# EAGLE board rat_clone_v01 (EAGLE 5.10)
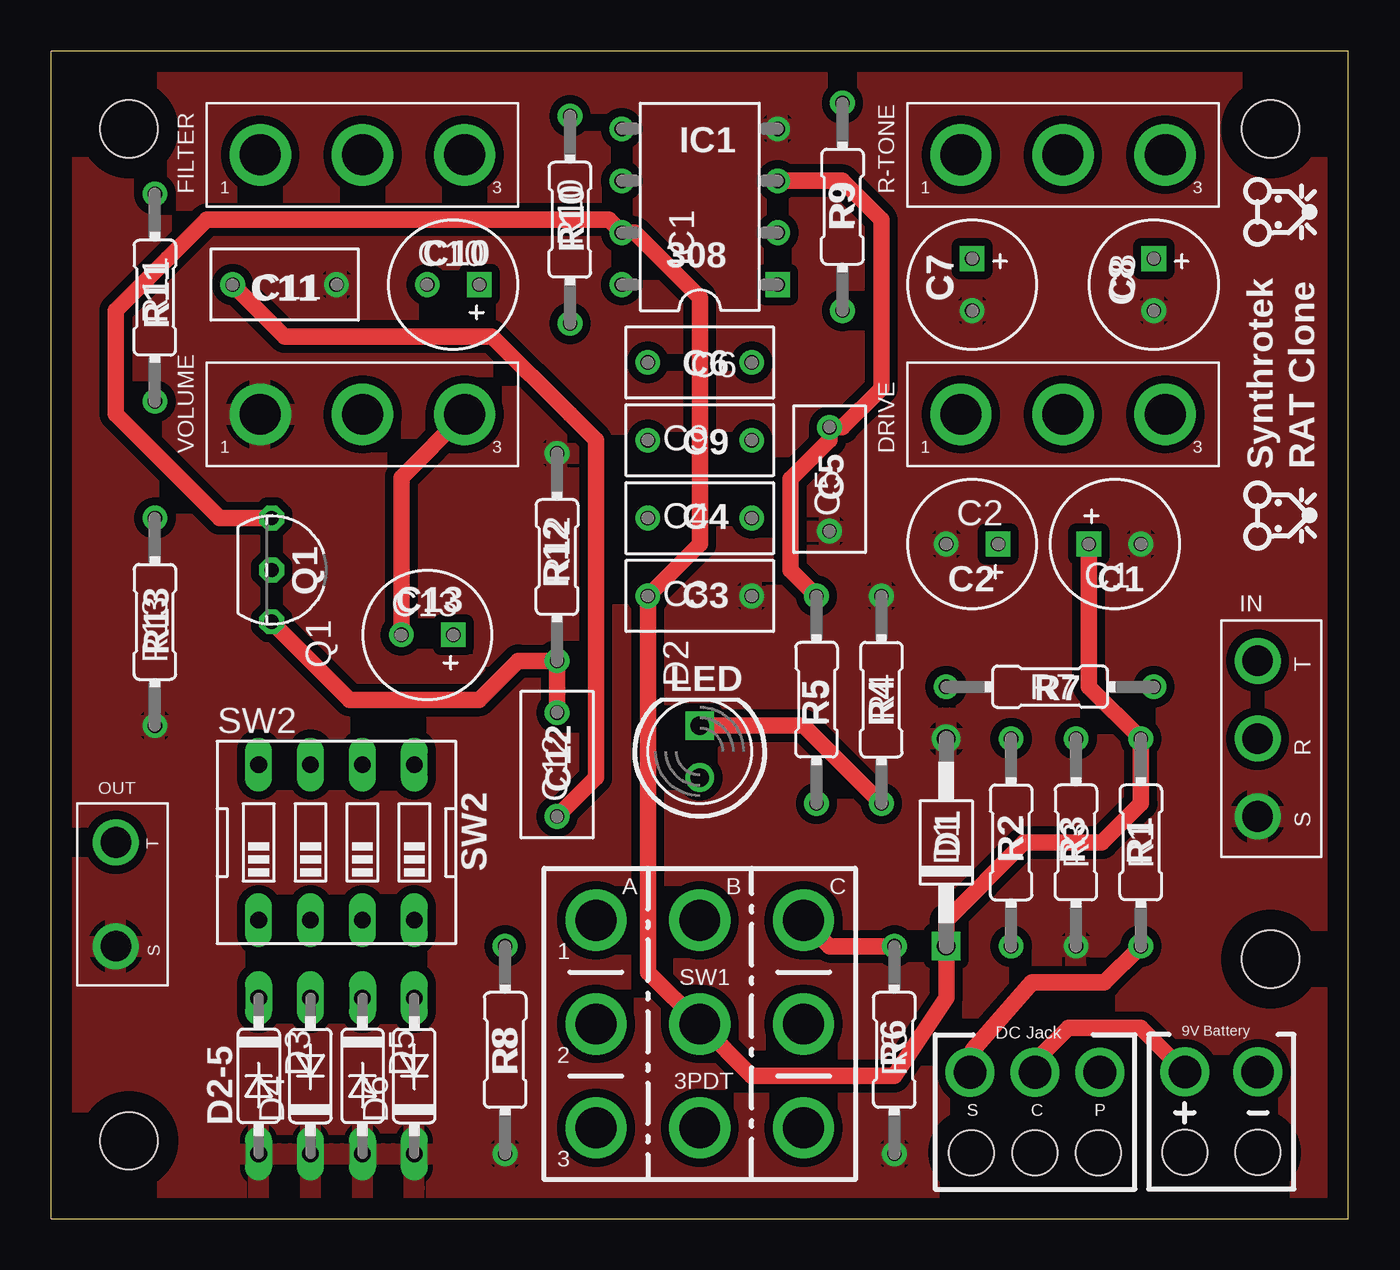
[diagram p0: board, top side]
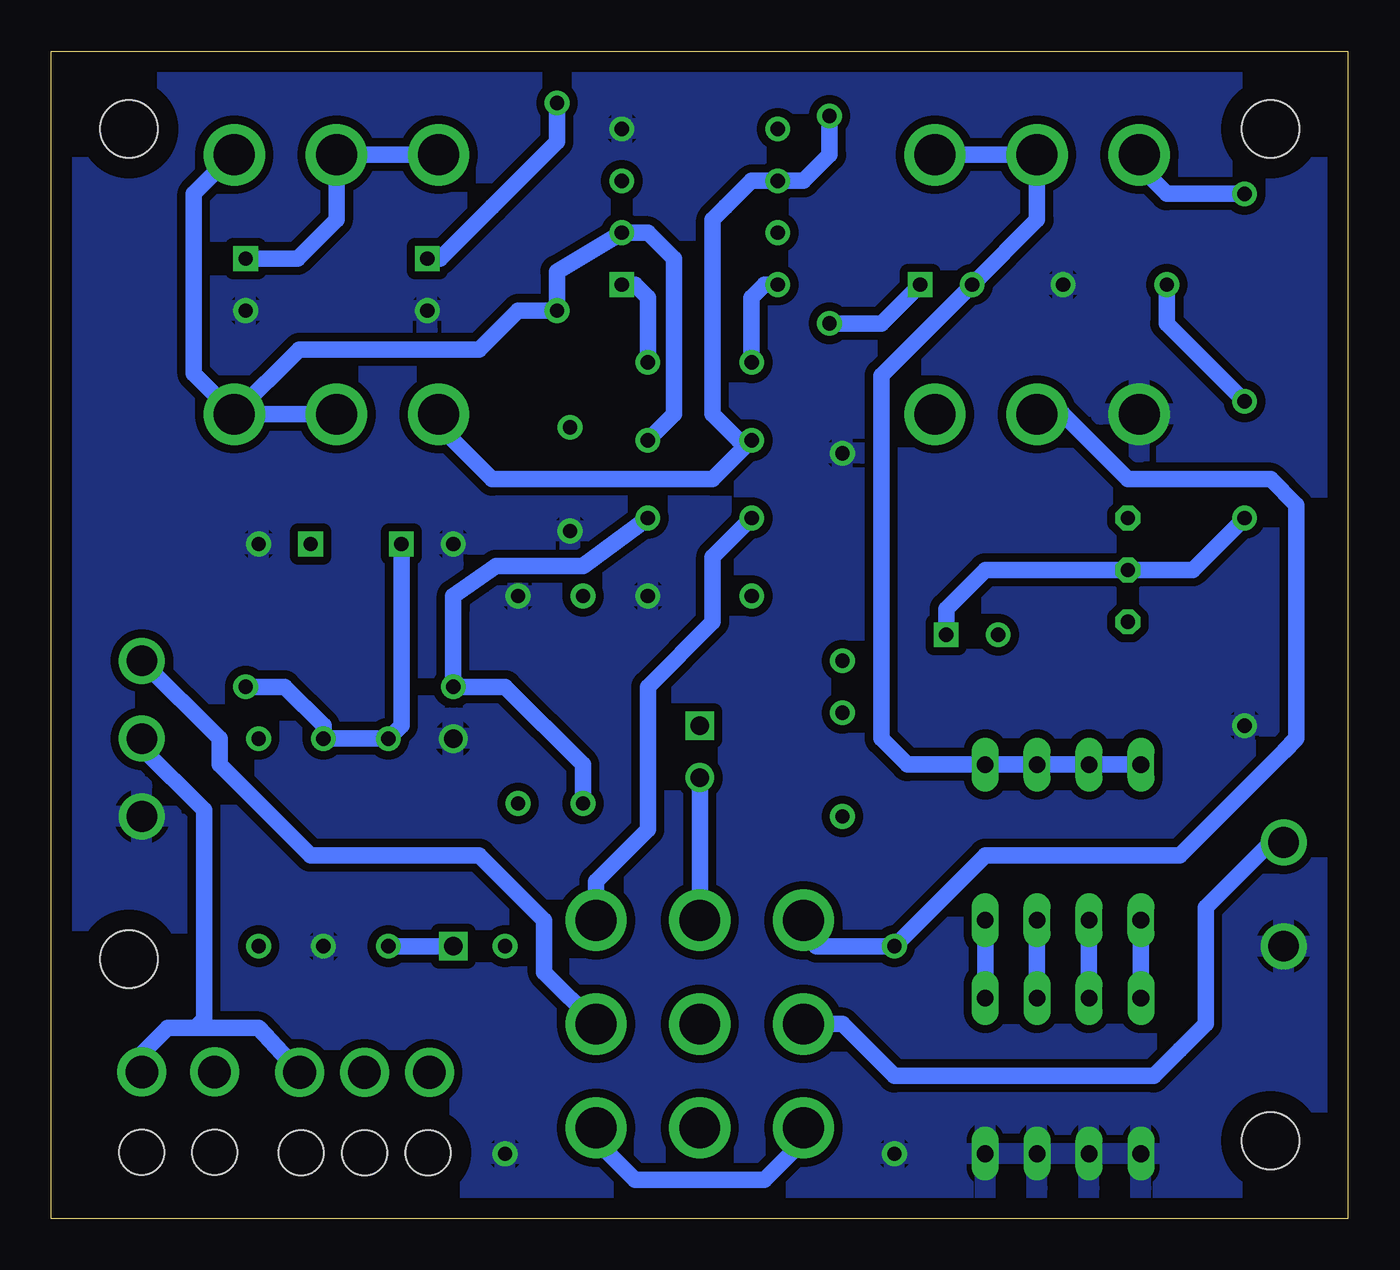
[diagram p1: board, bottom side, seen from below]

Size 63.5 x 57.15 mm. Coordinates in mm from the lower left corner, seen from the top.
Outline: 0,0 63.5,0 63.5,57.15 0,57.15 0,0
Copper layers (1*16): Top 0.035mm / dielectric 1.5mm / Bottom 0.035mm
Design rules "default": minimum track width 10mil, minimum drill 24mil, track to track 8mil, track to pad 8mil, pad to pad 8mil, via to via 8mil, smd to smd 8mil, copper to edge 40mil, drill to drill 8mil, minimum pad ring 10mil, minimum via ring 8mil, stop-mask expansion 4mil, vias tented up to drill 0mil, thermal gap 10mil
Holes 2.8 mm at 3.81,3.81 59.69,12.7 59.69,53.34 3.81,53.34

## Footprints (pad centres in the part's own frame; a part is rotated, then mirrored left to right if it is on the bottom)
063_025 = drill 0.7 square: + -1.27,0 | drill 0.7 round: - 1.27,0
072X035 = drill 0.7 round: 1 -2.54,0; 2 2.54,0
DO41-4 = drill 0.9 round: A 5.08,0 | drill 0.9 square: C -5.08,0
LED5MM = drill 0.9 round: A -1.27,0 | drill 0.9 square: K 1.27,0
DO35-7 = drill 0.813 long: A 3.81,0; C -3.81,0
POT = drill 2 round: 1 -5,0; 2 0,0; 3 5,0
DIL08 = drill 0.7 square: 1 -3.81,-3.81 | drill 0.7 round: 2 -1.27,-3.81; 3 1.27,-3.81; 4 3.81,-3.81; 5 3.81,3.81; 6 1.27,3.81; 7 -1.27,3.81; 8 -3.81,3.81
STEREO_JACK = drill 1.5 round: R 0,0; S 3.81,0; T -3.81,0
MONO_JACK = drill 1.5 round: SLEEVE 2.54,0; TIP -2.54,0
TO-92 = drill 0.7 octagon: 1 -2.54,0; 2 0,0; 3 2.54,0
R0207/4 = drill 0.7 round: 1 -5.08,0; 2 5.08,0
3PDT = drill 2 round: A1 -5.08,5.08; A2 -5.08,0; A3 -5.08,-5.08; B1 0,5.08; B2 0,0; B3 0,-5.08; C1 5.08,5.08; C2 5.08,0; C3 5.08,-5.08
EDG-04 = drill 0.813 long: 1 -3.81,-3.81; 2 -1.27,-3.81; 3 1.27,-3.81; 4 3.81,-3.81; 5 3.81,3.81; 6 1.27,3.81; 7 -1.27,3.81; 8 -3.81,3.81
9V_BATTERY = drill 1.6 round: 9V_BATTERY_+ -1.778,1.27; 9V_BATTERY_- 1.778,1.27 | hole 2.2: -1.778,-2.667; 1.778,-2.667
DC_JACK_OFFBOARD = drill 1.6 round: CONNECT 0,1.27; PIN 3.175,1.27; SLEEVE -3.175,1.27 | hole 2.2: -3.111,-2.667; 0,-2.667; 3.111,-2.667

## Placement (x,y rotation side)
C1  100uF  [063_025]  52.07,33.02 0 top
C2  47uF  [063_025]  45.09,33.02 180 top
C3  47nF  [072X035]  31.75,30.48 0 top
C4  22nF  [072X035]  31.75,34.29 0 top
C5  0.001uF  [072X035]  38.1,36.2 90 top
C6  30pF  [072X035]  31.75,41.91 180 top
C7  4.7uF  [063_025]  45.09,45.72 270 top
C8  2.2uF  [063_025]  53.98,45.72 270 top
C9  100pF  [072X035]  31.75,38.1 0 top
C10  4.7uF  [063_025]  19.68,45.72 180 top
C11  0.0033uF  [072X035]  11.43,45.72 180 top
C12  0.0022uF  [072X035]  24.77,22.23 90 top
C13  1uF  [063_025]  18.41,28.57 180 top
D1  1N4002  [DO41-4]  43.81,18.41 90 top
D2  LED5MM  [LED5MM]  31.75,22.86 90 top
D3  1N914  [DO35-7]  10.16,6.99 270 top
D4  1N914  [DO35-7]  12.7,6.99 90 top
D5  1N34  [DO35-7]  15.24,6.99 270 top
D6  1N34  [DO35-7]  17.78,6.99 90 top
DRIVE  100kA  [POT]  49.53,39.37 0 top
FILTER  100kA  [POT]  15.24,52.07 0 top
IC1  LM308N  [DIL08]  31.75,49.53 90 top
IN  [STEREO_JACK]  59.05,23.5 270 top
OUT  [MONO_JACK]  3.17,15.88 270 top
Q1  2N5458  [TO-92]  10.79,31.75 270 top
R1  47  [R0207/4]  53.34,18.41 90 top
R2  100k  [R0207/4]  46.99,18.41 270 top
R3  100k  [R0207/4]  50.16,18.41 90 top
R4  1k  [R0207/4]  40.64,25.4 270 top
R5  1k  [R0207/4]  37.47,25.4 90 top
R6  1M  [R0207/4]  41.27,8.26 90 top
R7  1M  [R0207/4]  48.9,26.04 180 top
R8  1M  [R0207/4]  22.23,8.26 90 top
R9  560  [R0207/4]  38.73,49.53 270 top
R10  1k  [R0207/4]  25.4,48.9 90 top
R11  1.5K  [R0207/4]  5.08,45.09 90 top
R12  1M  [R0207/4]  24.77,32.38 90 top
R13  10k  [R0207/4]  5.08,29.21 270 top
R-TONE  1k  [POT]  49.53,52.07 0 top
SW1  3PDT  [3PDT]  31.75,9.53 0 top
SW2  [EDG-04]  13.97,18.41 0 top
U$1  9V_BATTERY_CLIP  [9V_BATTERY]  57.28,5.91 0 top
U$2  DC_JACK_OFFBOARD  [DC_JACK_OFFBOARD]  48.16,5.89 0 top
VOLUME  100kA  [POT]  15.24,39.37 0 top

## Library data of the parts
C1 C2 C7 C8 C10 C13 = gm-caps-electro-pol
C3-C6 C9 C11 C12 = gm-caps-film-box
D1 D2 = gm-diodes
D3-D6 = diode
DRIVE FILTER IN OUT Q1 R-TONE SW1 U$1 U$2 VOLUME = 00_steve
IC1 = gm-ics
R1-R13 = gm-resistors
SW2 = special

## Nets
4.5V: C2.+ R2.1 R3.2 R7.1
9V: C1.+ C3.1 D1.C IC1.7 Q1.1 R1.2 R2.2 SW1.B2
FILTER: C10.- FILTER.2 FILTER.3 SW2.5 SW2.6 SW2.7 SW2.8
GND: C1.- C2.- C3.2 C5.1 C7.- C8.- C11.1 D1.A D3.A D4.C D5.A D6.C IC1.4 IN.S OUT.SLEEVE R3.1 R4.1 R6.1 R8.1 R12.2 R13.2 VOLUME.1
N$1: U$1.9V_BATTERY_+ U$2.CONNECT
N$2: C5.2 IC1.3 R5.2
N$3: D2.K R4.2
N$4: OUT.TIP SW1.A2
N$5: C4.1 R6.2 SW1.C1
N$6: SW1.A3 SW1.C3
N$7: R1.1 U$2.SLEEVE
N$8: IN.T SW1.C2
N$9: D2.A SW1.B1
N$10: C9.2 DRIVE.2 DRIVE.3 IC1.2 R9.2 R-TONE.3
N$11: C4.2 R5.1 R7.2
N$12: C6.2 IC1.8
N$13: C10.+ R10.1
N$14: C6.1 IC1.1
N$16: C7.+ R9.1
N$17: C8.+ R-TONE.1 R-TONE.2
N$18: C9.1 DRIVE.1 IC1.6 R10.2
N$19: C12.2 Q1.3 R12.1
N$20: FILTER.1 R11.2
N$21: D3.C SW2.1
N$22: IN.R U$1.9V_BATTERY_- U$2.PIN
N$23: C11.2 C12.1 R11.1
N$24: C13.+ Q1.2 R13.1
N$25: C13.- VOLUME.3
N$26: R8.2 SW1.A1 VOLUME.2
N$27: D4.A SW2.2
N$28: D5.C SW2.3
N$29: D6.A SW2.4

## Tracks (layer width: path | path; a pad name or v marks a point on that pad's centre or on a via)
4.5V
  Bottom 0.813: R7.1 52.07,26.04 50.16,24.13 R3.2 R2.1 46.35,24.13 C2.+
9V
  Top 0.813: C1.+ 50.8,26.04 R1.2 53.34,20.32 51.44,18.41 47.62,18.41 43.81,14.61 D1.C 43.81,10.79 41.27,6.99 35.56,6.99 34.92,6.99 34.29,6.99 SW1.B2 29.21,12.06 C3.1 31.75,33.02 31.75,33.66 31.75,36.2 31.75,36.83 31.75,37.47 31.75,45.09 28.57,48.26 IC1.7 27.3,48.9 7.62,48.9 5.71,46.99 3.17,44.45 3.17,39.37 8.26,34.29 Q1.1
  Bottom 0.813: D1.C R2.2
FILTER
  Bottom 0.813: FILTER.3 FILTER.2 15.24,48.9 C10.- 22.86,41.27 22.86,23.5 21.59,22.23 SW2.5 SW2.6 SW2.7 SW2.8
GND
  pour Bottom (isolate 0.406): 0,57.15 63.5,57.15 63.5,0 0,0
  pour Top (isolate 0.406): 0,57.15 63.5,57.15 63.5,0 0,0
N$1
  Top 0.813: U$1.9V_BATTERY_+ 53.34,9.34 49.78,9.34 48.45,8 48.45,7.62 U$2.CONNECT
N$2
  Top 0.813: IC1.3 38.73,50.8 40.64,48.9 40.64,40.64 38.73,38.73 C5.2 38.1,38.1 36.2,36.2 36.2,31.75 R5.2
N$3
  Top 0.813: D2.K 36.83,24.13 R4.2
N$4
  Bottom 0.813: SW1.A2 24.77,9.53 22.23,6.99 9.53,6.99 8.26,8.26 6.99,9.53 6.99,15.24 3.81,18.41 OUT.TIP
N$5
  Top 0.813: R6.2 38.1,13.34 SW1.C1
  Bottom 0.813: SW1.C1 36.83,16.51 34.29,19.05 34.29,26.04 31.11,29.21 31.11,32.38 C4.1
N$6
  Bottom 0.813: SW1.C3 36.83,3.81 34.92,1.91 28.57,1.91 26.67,3.81 SW1.A3
N$7
  Top 0.813: U$2.SLEEVE 45.11,8.26 48.01,11.56 51.56,11.56 R1.1
N$8
  Bottom 0.813: IN.T 55.24,23.5 55.24,22.23 50.8,17.78 42.55,17.78 39.37,14.61 39.37,12.06 SW1.C2
N$9
  Bottom 0.813: SW1.B1 D2.A
N$10
  Bottom 0.813: C9.2 33.02,39.37 33.02,46.99 34.29,48.26 IC1.2 38.73,46.35 R9.2 40.64,44.45 42.55,42.55 51.35,42.55 DRIVE.3 | R-TONE.3 54.61,52.07 56.52,50.16 56.52,41.35 DRIVE.3 | DRIVE.3 DRIVE.2
N$11
  Bottom 0.813: C4.2 37.47,31.94 41.72,31.94 43.81,30.48 43.81,29.84 R7.2 41.27,26.04 37.47,22.23 R5.1
N$12
  Bottom 0.813: IC1.8 28.57,45.72 29.21,45.09 C6.2
N$13
  Bottom 0.813: C10.+ 22.86,43.81 R10.1
N$14
  Bottom 0.813: C6.1 34.29,45.09 34.92,45.72 IC1.1
N$16
  Bottom 0.813: R9.1 38.73,52.7 41.91,49.53 44.45,46.99 C7.+
N$17
  Bottom 0.813: R-TONE.1 R-TONE.2 49.53,48.9 51.44,46.99 C8.+
N$18
  Bottom 0.813: R10.2 25.4,52.07 26.67,50.8 IC1.6 29.21,50.8 30.48,49.53 31.11,48.9 31.11,39.37 29.84,38.1 C9.1 31.11,36.2 41.91,36.2 44.53,38.81 DRIVE.1
N$19
  Top 0.813: C12.2 R12.1 22.86,27.3 20.95,25.4 14.61,25.4 Q1.3
N$20
  Bottom 0.813: FILTER.1 10.24,51.52 8.89,50.16 R11.2
N$21
  Bottom 0.813: D3.C 10.16,13.97 SW2.1
N$22
  Bottom 0.813: U$1.9V_BATTERY_- 59.05,8.06 57.78,9.34 56.45,9.34 | 56.45,9.34 53.34,9.34 U$2.PIN | IN.R 59.05,23.05 56.01,20 56.01,9.78 56.45,9.34
N$23
  Top 0.813: C12.1 26.67,21.59 26.67,38.1 25.4,39.37 21.59,43.18 11.43,43.18 C11.2
  Bottom 0.813: C11.2 8.89,43.81 R11.1
N$24
  Bottom 0.813: R13.1 7.62,31.75 Q1.2 17.78,31.75 19.68,29.84 C13.+
N$25
  Top 0.813: C13.- 17.14,36.27 VOLUME.3
N$26
  Bottom 0.813: SW1.A1 26.67,13.97 26.04,13.34 R8.2 17.78,17.78 8.26,17.78 3.17,22.86 2.54,23.5 2.54,34.92 3.81,36.2 10.79,36.2 13.97,39.37 VOLUME.2
N$27
  Bottom 0.813: D4.A SW2.2
N$28
  Bottom 0.813: D5.C SW2.3
N$29
  Bottom 0.813: D6.A SW2.4

## Text on the board
tPlace: IC1 | R9 | C10 | R10 | 308 | C11 | C7 | C8 | R11 | C6 | C9 | Synthrotek | RAT Clone | C5 | C4 | Q1 | R12 | C2 | C1 | C13 | C3 | R13 | LED | R7 | C12 | R5 | R4 | R1 | D1 | SW2 | R2 | R3 | R8 | R6 | D2-5